# EAGLE board All_Board (EAGLE 9.5.1)
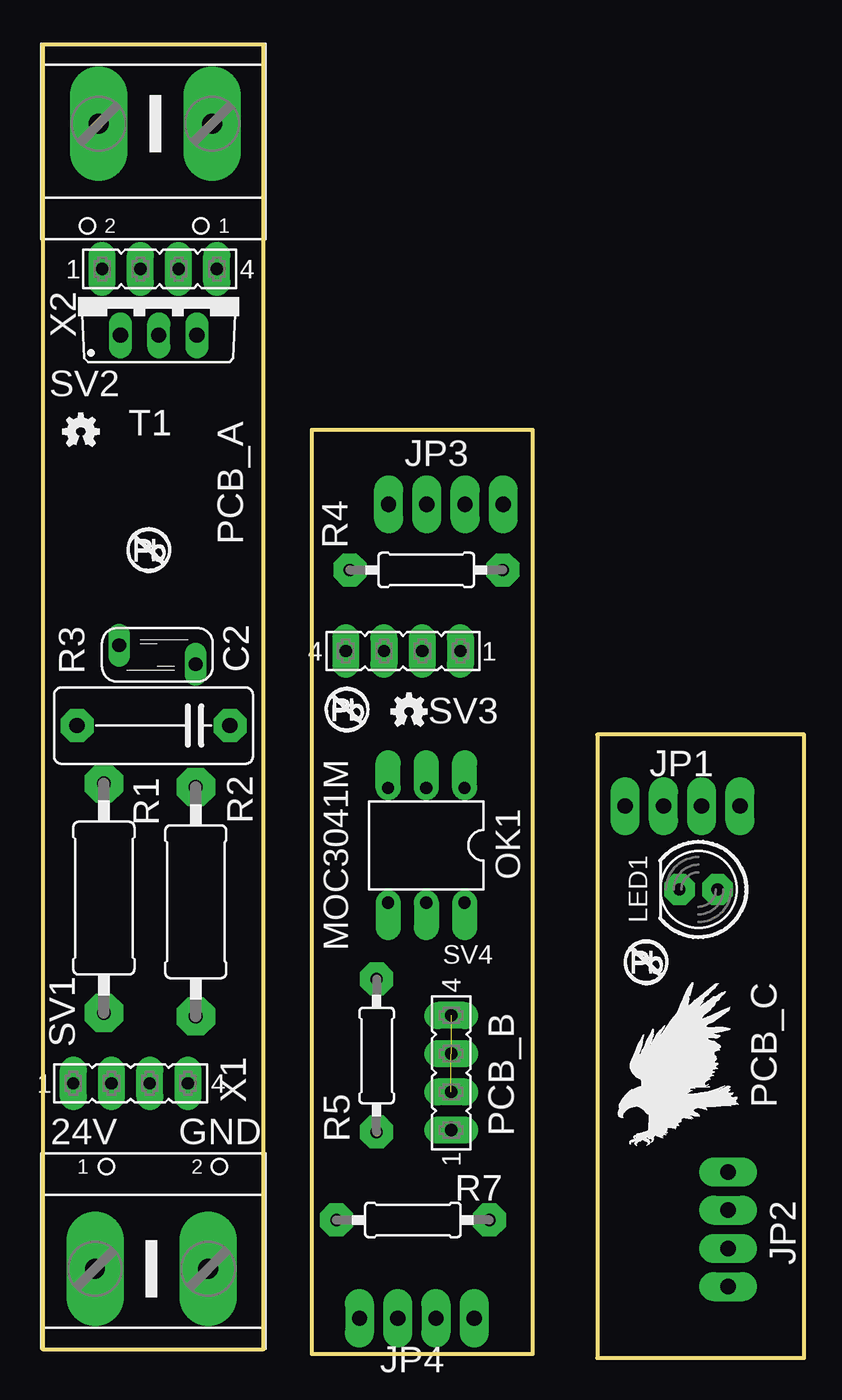
[diagram p0: board, top side]
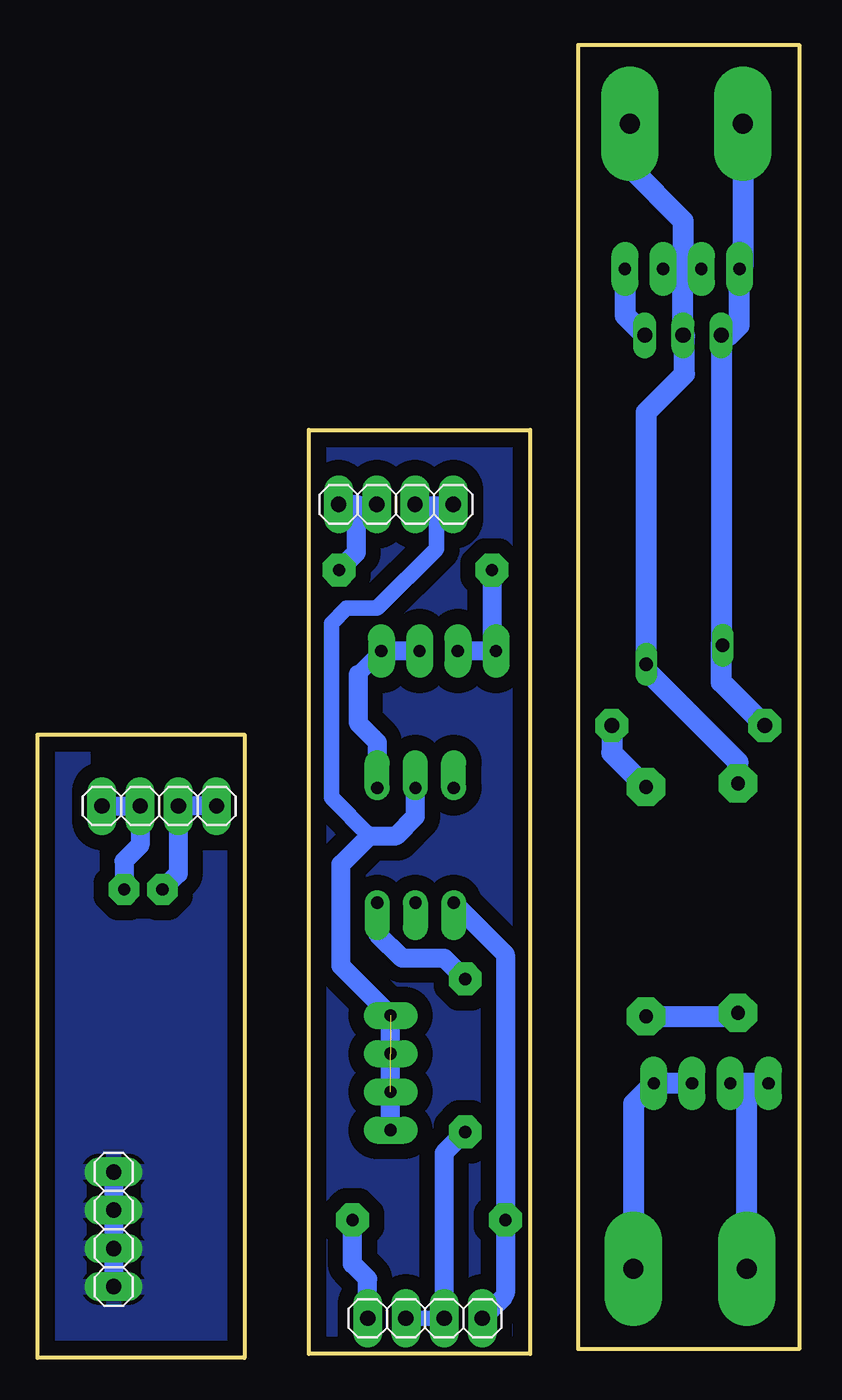
[diagram p1: board, bottom side, seen from below]

Size 50.6 x 87.22 mm. Coordinates in mm from the lower left corner, seen from the top.
Outline: 36.85,0 50.6,0 50.6,41.4 36.85,41.4 36.85,0
Outline: 0,87.22 0,0.58 14.68,0.58 14.68,87.22 0,87.22
Outline: 32.57,0.27 32.57,61.65 17.87,61.65 17.87,0.27 32.57,0.27
Copper layers (1*16): Top 0.035mm / dielectric 1.5mm / Bottom 0.035mm
Design rules "default": minimum track width 6mil, minimum drill 0.35mm, track to track 6mil, track to pad 6mil, pad to pad 6mil, via to via 6mil, smd to smd 6mil, copper to edge 40mil, drill to drill 6mil, minimum pad ring 10mil, minimum via ring 8mil, stop-mask expansion 4mil, vias tented up to drill 0mil, thermal gap 10mil

## Footprints (pad centres in the part's own frame; a part is rotated, then mirrored left to right if it is on the bottom)
C102-054X133 = drill 1.016 pad 2.184 octagon: 1 -5.08,0; 2 5.08,0
1X04H = drill 1.016 pad 1.93 long: 1 -3.81,0; 2 -1.27,0; 3 1.27,0; 4 3.81,0
LED5MM_GREEN = drill 0.813 pad 2.032 octagon: A -1.27,0; K 1.27,0
DIL06 = drill 0.813 pad 1.676 offset: 1 -2.54,-3.81; 2 0,-3.81; 3 2.54,-3.81; 4 2.54,3.81; 5 0,3.81; 6 -2.54,3.81
0411/15 = drill 0.914 pad 2.54 octagon: 1 -7.62,0; 2 7.62,0
S05K11 = drill 0.914 long: 1 -0.635,-2.54; 2 0.635,2.54
0207/10 = drill 0.813 pad 2.184 octagon: 1 -5.08,0; 2 5.08,0
FE04-1 = drill 0.813 pad 1.778 long: 1 -3.81,0; 2 -1.27,0; 3 1.27,0; 4 3.81,0
TO220BV = drill 1.016 long: G 2.54,-2.54; T1 -2.54,-2.54; T2 0,-2.54
GMKDSP_3/2 = drill 1.321 pad 3.81 long: 1 -3.765,0; 2 3.765,0

## Placement (x,y rotation side)
C2  10nF/400V  [C102-054X133]  7.37,42 180 top
JP1  [1X04H]  42.52,36.66 0 bottom
JP2  [1X04H]  45.55,8.54 90 bottom
JP3  [1X04H]  26.79,56.7 0 bottom
JP4  [1X04H]  24.86,2.63 180 bottom
LED1  GREEN  [LED5MM_GREEN]  43.58,31.12 180 top
OK1  MOC3041M  [DIL06]  25.49,34.05 180 top
R1  27/1W  [0411/15]  4.06,30.54 270 top
R2  27/1W  [0411/15]  10.17,30.3 270 top
R3  JVR7N431K  [S05K11]  7.62,46.7 270 top
R4  2k  [0207/10]  25.49,52.34 180 top
R5  360  [0207/10]  22.19,20.08 270 top
R7  330  [0207/10]  24.6,9.16 180 top
SV1  [FE04-1]  5.84,18.23 0 top
SV2  [FE04-1]  7.76,72.34 0 top
SV3  [FE04-1]  23.95,46.95 180 top
SV4  [FE04-1]  27.14,18.94 90 top
T1  BT138-V  [TO220BV]  7.71,70.48 0 top
U$1  [EAGLE-PLC-8MM]  38.25,14.1 0 top
U$2  [NO_PB_LOGO_0.120]  38.37,24.38 0 top
U$3  [NO_PB_LOGO_0.120]  5.33,51.76 0 top
U$4  [OSHW-LOGO-MINI]  2.54,61.54 0 top
U$5  [OSHW-LOGO-MINI]  24.35,42.94 0 top
U$6  [NO_PB_LOGO_0.120]  18.5,41.16 0 top
X1  [GMKDSP_3/2]  7.24,5.91 0 top
X2  [GMKDSP_3/2]  7.49,81.99 180 top

## Library data of the parts
C2 = rcl; SPICEPREFIX: C
JP1-JP4 = pinhead
LED1 = led
OK1 = optocoupler; MF: FAIRCHILD SEMICONDUCTOR; MPN: MOC3041M; OC_FARNELL: 1086677; OC_NEWARK: 78K6090
R1 R2 = rcl; SPICEPREFIX: R
R3 = varistor
R4 R7 = rcl; OC_FARNELL: unknown; SPICEPREFIX: R
R5 = rcl; MF: TT ELECTRONICS / WELWYN; MPN: MFR4-360RFI; OC_FARNELL: 1099880; SPICEPREFIX: R
SV1-SV4 = con-lsta; OC_FARNELL: unknown; OC_NEWARK: unknown
T1 = triac; OC_FARNELL: unknown
U$1 = logo
U$2-U$6 = SparkFun-Aesthetics
X1 X2 = con-ptr500; OC_FARNELL: unknown; OC_NEWARK: unknown

## Nets
+24V: SV1.1 SV1.2 X1.1
GND: SV1.3 SV1.4 X1.2
N$1: JP1.1 JP1.2 LED1.A
N$2: JP1.3 JP1.4 LED1.K
N$3: C2.2 R3.1 SV2.1 T1.T1 X2.2
N$4: JP2.1 JP2.2 JP2.3 JP2.4
N$5: SV2.4 T1.G
N$6: C2.1 R2.1
N$7: R1.1 R3.2 SV2.2 SV2.3 T1.T2 X2.1
N$8: R1.2 R2.2
N$9: R4.2 SV3.3 SV3.4
N$10: OK1.1 SV3.1 SV3.2
N$11: OK1.6 R5.1
N$12: JP4.1 OK1.4 R7.2
N$13: JP3.1 JP3.2 R4.1
N$14: JP3.3 JP3.4 OK1.2 SV4.1 SV4.2 SV4.3 SV4.4
N$15: JP4.2 JP4.3 R5.2
N$16: JP4.4 R7.1

## Tracks (layer width: path | path; a pad name or v marks a point on that pad's centre or on a via)
+24V
  Bottom 1.27: 3.47,17.9 3.81,18.23
  Bottom 1.4: SV1.1 3.81,18.23 SV1.2 | X1.1 3.47,17.9
GND
  Bottom 1.4: SV1.3 SV1.4 11,16.88 X1.2
N$1
  Bottom 1.27: JP1.1 JP1.2 43.79,34.06 44.85,33 LED1.A
N$2
  Bottom 1.27: JP1.4 JP1.3 41.25,32.18 LED1.K
N$3
  Bottom 1.27: 5.17,47.43 R3.1 | 3.73,72.56 SV2.1 4,72.29 | 4.64,67.94 T1.T1
  Bottom 1.4: T1.T1 5.17,47.43 5.17,44.88 C2.2 | X2.2 3.73,72.56 | 4,72.29 4,68.58 4.64,67.94
N$4
  Bottom 1.27: JP2.4 JP2.3 JP2.2 JP2.1
  pour Bottom (isolate 1.016): 36.85,41.4 36.85,0 50.6,0 50.6,41.4
N$5
  Bottom 1.4: SV2.4 11.57,69.26 T1.G
N$6
  Bottom 1.4: C2.1 12.45,40.19 R2.1
N$7
  Bottom 1.27: SV2.3 9.16,72.46 | 7.62,67.85 T1.T2 | 10.16,45.66 R3.2 | 7.71,72.13 7.5,72.34
  Bottom 1.4: R3.2 10.16,62.81 7.62,65.35 7.62,67.85 | R1.1 4.06,39.57 10.16,45.66 | SV2.2 7.5,72.34 SV2.3 | T1.T2 7.71,72.13 7.71,75.54 11.26,79.09 X2.1
N$8
  Bottom 1.4: R1.2 4.31,22.68 R2.2
N$9
  Bottom 1.27: R4.2 20.41,47.22 SV3.4 SV3.3
N$10
  Bottom 1.016: SV3.1 29.3,45.41
  Bottom 1.27: SV3.2 SV3.1 | 29.3,45.41 29.3,42.18 28.03,40.91 OK1.1
N$11
  Bottom 1.016: OK1.6 28.03,28.21
  Bottom 1.27: 28.03,28.21 26.38,26.56 23.59,26.56 R5.1
N$12
  Bottom 1.016: 19.66,4.02 19.52,4.28
  Bottom 1.27: OK1.4 19.52,26.81 R7.2 19.52,4.28 | JP4.1 19.66,4.02
N$13
  Bottom 1.016: JP3.2 JP3.1
  Bottom 1.27: R4.1 29.43,53.48 29.43,56.56 29.45,56.58 29.39,56.7 JP3.1
N$14  (2 unrouted)
  Bottom 1.016: JP3.4 JP3.3 24.09,56.7 24.09,53.74 28.03,49.8 30.06,49.8 31.08,48.78 31.08,37.23 28.54,34.69
  Bottom 1.27: OK1.2 25.49,35.96 26.76,34.69 28.54,34.69 30.44,32.78 30.44,26.05 SV4.4 SV4.1
N$15
  Bottom 1.016: 23.59,2.76 23.59,2.75 JP4.2 JP4.3
  Bottom 1.27: R5.2 23.59,13.61 23.59,2.76
N$16
  Bottom 1.016: 28.67,5.24 28.84,5.35 28.79,5.35
  Bottom 1.27: JP4.4 28.67,5.24 | 28.79,5.35 29.68,6.24 R7.1
N$17
  pour Bottom (isolate 1.016): 17.87,61.65 17.87,0.27 32.57,0.27 32.57,61.65

## Text on the board
tNames: PCB_A | PCB_C | PCB_B | 24V | GND